# EAGLE board thick (EAGLE 9.6.2)
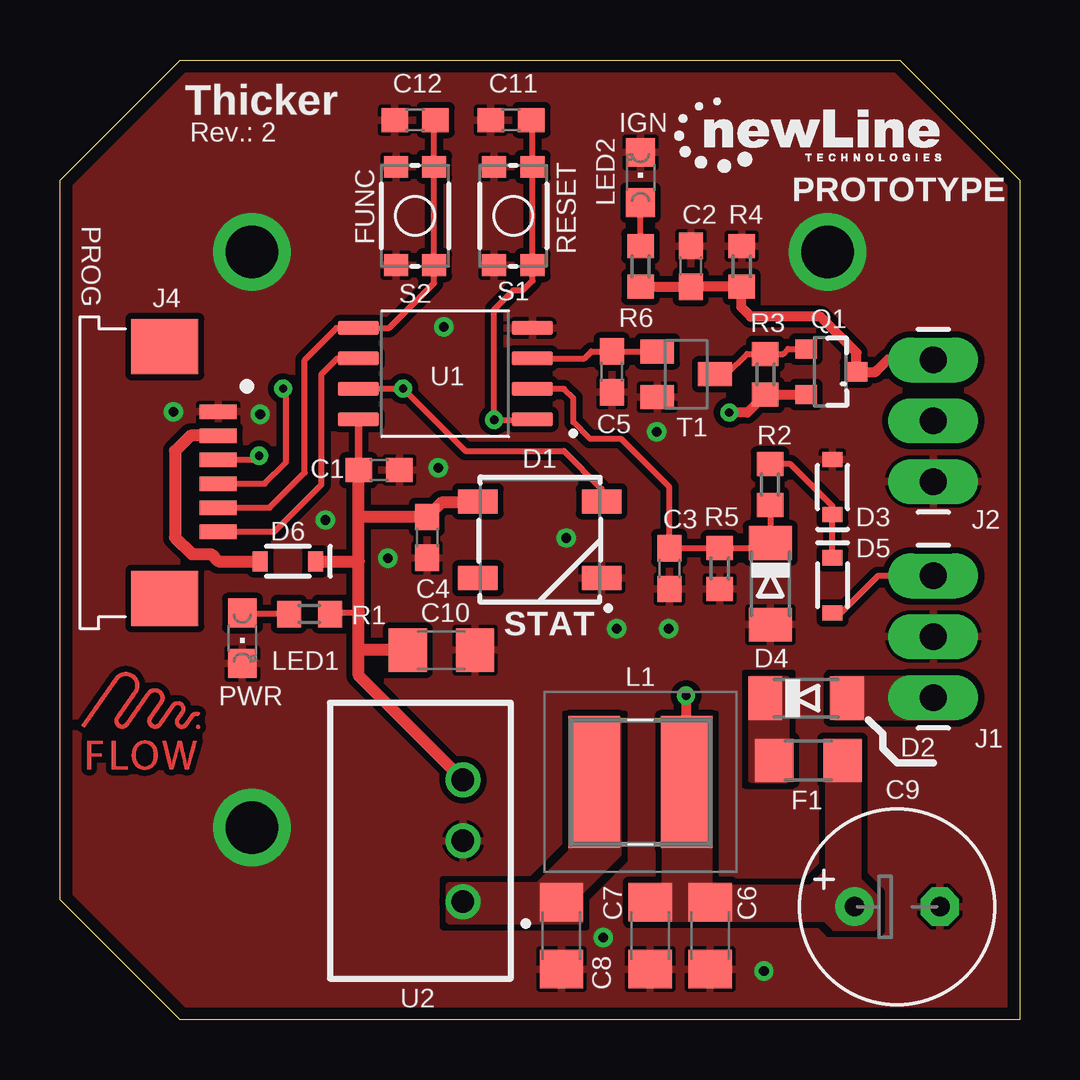
[diagram p0: board, top side]
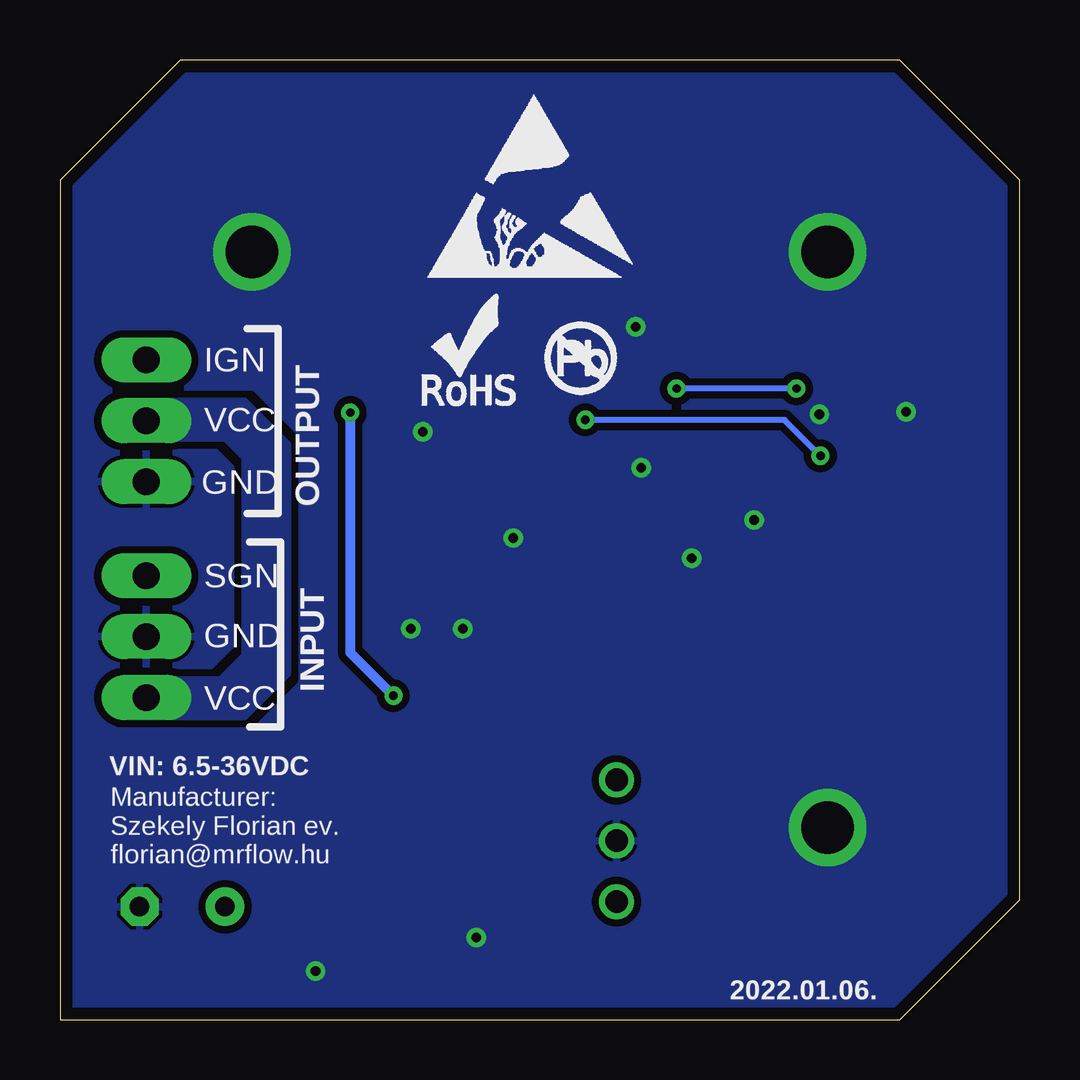
[diagram p1: board, bottom side, seen from below]

Size 40 x 40 mm. Coordinates in mm from the lower left corner, seen from the top.
Outline: 40,0 5,0 0,5 0,35 5,40 35,40 40,35 40,0
Copper layers (1*16): Top 0.035mm / dielectric 1.5mm / Bottom 0.035mm
Design rules "NYAKARUHAZ *": minimum track width 6mil, minimum drill 12mil, track to track 10mil, track to pad 10mil, pad to pad 10mil, via to via 10mil, smd to smd 6mil, copper to edge 20mil, drill to drill 8mil, minimum pad ring 10mil, minimum via ring 8mil, stop-mask expansion 4mil, vias tented up to drill 16mil, thermal gap 6mil

## Footprints (pad centres in the part's own frame; a part is rotated, then mirrored left to right if it is on the bottom)
C0603 = smd 1.1 x 1: 1 -0.85,0; 2 0.85,0
C1206 = smd 1.6 x 1.8: 1 -1.4,0; 2 1.4,0
E3,5-8 = drill 0.813 pad 1.6: + -1.778,0 | drill 0.813 pad 1.6 octagon: - 1.778,0
WS2812B = smd 1.651 x 1: 1 2.577,-1.6; 2 2.577,1.6; 3 -2.577,1.6; 4 -2.577,-1.6
MINIMELF = smd 1.4 x 1.8: A 1.7,0; C -1.7,0
SOD-323 = smd 0.63 x 0.83: A 1.15,0; C -1.15,0
R1206 = smd 1.6 x 1.803: 1 -1.422,0; 2 1.422,0
1X03_LONGPADS = drill 1.118 pad 1.88 long: 1 0,0; 2 2.54,0; 3 5.08,0
1X06-1MM = smd 0.6 x 1.55: 1 -2.54,1.27; 2 -1.54,1.27; 3 -0.54,1.27; 4 0.46,1.27; 5 1.46,1.27; 6 2.46,1.27 | smd 2.3 x 2.8: P$1 -5.25,-0.955; P$2 5.25,-0.955
TCK047 = smd 5.5 x 2.15: 1 0,1.925; 2 0,-1.925
CHIPLED_0805 = smd 1.2 x 1.2: A 0,-1.05; C 0,1.05
SOT23-3 = smd 0.8 x 0.9: 1 -0.95,-1; 2 0.95,-1; 3 0,1.1
R0603 = smd 1 x 1.1: 1 -0.85,0; 2 0.85,0
TACTILE_SWITCH_SMD_4.6X2.8MM = smd 0.9 x 1: 1 -2.05,-0.8; 2 2.05,-0.8; 3 2.05,0.8; 4 -2.05,0.8
SC59-BEC = smd 1 x 1.4: B -0.95,-1.2; C 0,1.2; E 0.95,-1.2
SOIC127P798X216-8N = smd 1.71 x 0.58: 1 -3.63,1.905; 2 -3.63,0.635; 3 -3.63,-0.635; 4 -3.63,-1.905; 5 3.63,-1.905; 6 3.63,-0.635; 7 3.63,0.635; 8 3.63,1.905
TSR-0.5-2433 = drill 0.94 pad 1.44: 1 3.21,2; 2 5.75,2; 3 8.29,2

## Placement (x,y rotation side)
C1  0.1uF  [C0603]  13.3,22.9 0 top
C2  0.1uF  [C0603]  26.3,31.4 90 top
C3  1uF  [C0603]  25.4,18.8 270 top
C4  1uF  [C0603]  15.3,20.1 270 top
C5  0.1uF  [C0603]  23,27 270 top
C6  4.7uF  [C1206]  27.1,3.5 270 top
C7  4.7uF  [C1206]  24.6,3.5 270 top
C8  4.7uF  [C1206]  20.9,3.5 270 top
C9  100uF  [E3,5-8]  34.9,4.7 0 top
C10  4.7uF  [C1206]  15.9,15.4 0 top
C11  0.1uF  [C0603]  18.8,37.5 180 top
C12  0.1uF  [C0603]  14.8,37.5 180 top
D1  WS2812B  [WS2812B]  20,20 180 top
D2  [MINIMELF]  31.1,13.4 0 top
D3  tvs  [SOD-323]  32.2,22.2 90 top
D4  5.6V  [MINIMELF]  29.61,18.16 270 top
D5  0.5A/40V/420mV  [SOD-323]  32.2,18.1 270 top
D6  0.5A/40V/420mV  [SOD-323]  9.5,19.1 180 top
F1  [R1206]  31.2,10.8 0 top
J1  [1X03_LONGPADS]  36.4,18.5 270 top
J2  [1X03_LONGPADS]  36.4,27.5 270 top
J4  F1003WR-S-06PT  [1X06-1MM]  5.32,22.8 270 top
L1  TCK-047  [TCK047]  24.2,9.9 270 top
LED1  [CHIPLED_0805]  7.6,15.9 180 top
LED2  [CHIPLED_0805]  24.2,35.1 0 top
Q1  SI2319DDS-T1-GE3  [SOT23-3]  32.1,27 270 top
R1  10K  [R0603]  10.4,16.9 180 top
R2  120K  [R0603]  29.6,22.3 270 top
R3  10K  [R0603]  29.4,26.9 270 top
R4  10K  [R0603]  28.42,31.4 270 top
R5  22K  [R0603]  27.5,18.8 90 top
R6  10K  [R0603]  24.2,31.4 90 top
S1  [TACTILE_SWITCH_SMD_4.6X2.8MM]  18.9,33.5 90 top
S2  [TACTILE_SWITCH_SMD_4.6X2.8MM]  14.8,33.5 90 top
T1  [SC59-BEC]  26.1,26.9 270 top
U1  ATTINY85-20SU  [SOIC127P798X216-8N]  16.06,26.92 180 top
U2  TSR_0.5-2450  [TSR-0.5-2433]  18.8,1.7 90 top
U$1  [ESD_LOGO]  25,30.3 0 bottom
U$2  [NO_PB_LOGO_0.120]  20.01,25.67 0 bottom
U$3  [ROHS_LOGO_0.18_IN]  25.1,25.5 0 bottom
U$5  [MRFLOW_7_5MM]  0.9,10 0 top

## Library data of the parts
C1-C12 R1-R6 = resistor
D1 = SparkFun-LED; PROD_ID: DIO-12503
D2 D4 = diode
D3 = SparkFun-DiscreteSemi; PROD_ID: DIO-10955; VALUE: 0.5A/40V/420mV
D5 D6 = SparkFun-DiscreteSemi; PROD_ID: DIO-10955
F1 LED1 LED2 = adafruit
J1 J2 = SparkFun-Connectors
J4 U$1 U$5 = FloManEagle
L1 = TCK-047; DESCRIPTION: Common Mode Choke, 0.01mH,1.44A; HEIGHT: 5mm; MANUFACTURER_NAME: Traco Power; MANUFACTURER_PART_NUMBER: TCK-047; MOUSER_PART_NUMBER: 495-TCK-047; MOUSER_PRICE-STOCK: https://www.mouser.co.uk/ProductDetail/TRACO-Power/TCK-047?qs=ckJk83FOD0WGchnAom6PdQ%3D%3D
Q1 = SparkFun-DiscreteSemi; PROD_ID: TRANS-11308
S1 S2 = SparkFun-Switches; PROD_ID: SWCH-13065
T1 = transistor
U1 = ATTINY85-20SU; AVAILABILITY: Warning; DESCRIPTION: AVR AVR® ATtiny, Functional Safety (FuSa) Microcontroller IC 8-Bit 20MHz 8KB (4K x 16) FLASH 8-SOIC; MF: Microchip Technology; MP: ATTINY85-20SU; PACKAGE: SOIC-8 Microchip; PRICE: None; PURCHASE-URL: https://pricing.snapeda.com/search/part/ATTINY85-20SU/?ref=eda
U2 = TSR_0.5-2450; DESCRIPTION: 0.5 Amp POL switching regulator, 4.75 to -32 VDC input, pos.-pos. circuit, LM78 compatible, SIP-3; HEIGHT: mm; MANUFACTURER_NAME: Traco Power; MANUFACTURER_PART_NUMBER: TSR 0.5-2450; MOUSER_PART_NUMBER: 495-TSR0.5-2450; MOUSER_PRICE-STOCK: https://www.mouser.co.uk/ProductDetail/TRACO-Power/TSR-05-2450?qs=ckJk83FOD0XpEgQBSwF%2FIw%3D%3D
U$2 U$3 = SparkFun-Aesthetics

## Nets
5V: C1.1 C4.1 C10.1 D1.1 D6.C R1.1 U1.8 U2.3
!RESET: C11.1 J4.3 S1.1 S1.2 U1.1
AIN: C3.1 D4.C R2.2 R5.2 U1.2
GND: C1.2 C2.2 C3.2 C4.2 C5.2 C6.2 C7.2 C8.2 C9.- C10.2 C11.2 C12.2 D1.3 D3.A D4.A J1.2 J2.3 J4.1 LED1.C LED2.C R4.1 R5.1 S1.3 S1.4 S2.3 S2.4 T1.E U1.4 U2.2
IGN_EN: C5.1 T1.B U1.3
IGNITION: C2.1 J2.1 Q1.3 R4.2 R6.1
MISO: J4.6 U1.6
MOSI: C12.1 J4.5 S2.1 S2.2 U1.5
N$1: Q1.1 R3.1 T1.C
N$2: C8.1 L1.2 U2.1
N$3: LED1.A R1.2
N$4: LED2.A R6.2
N$5: D6.A J4.2
N$6: D3.C D5.C R2.1
N$11: D2.C F1.1
SCK: D1.4 J4.4 U1.7
SIGNAL: D5.A J1.1
VCC: D2.A J1.3 J2.2
VDD: C6.1 C7.1 C9.+ F1.2 L1.1 Q1.2 R3.2

## Tracks (layer width: path | path; a pad name or v marks a point on that pad's centre or on a via)
5V
  Top 0.254: 12.45,17 12.4,16.95 11.3,16.95
  Top 0.305: C1.1 12.45,25 U1.8
  Top 0.508: D1.1 17.37,21.55 15.9,21.55 C4.1 12.5,20.95 12.45,21 | U2.3 12.45,14.34 12.45,15.5 | 12.45,15.5 12.45,17 12.45,19.1 | 12.45,19.1 12.45,21 | 12.45,21 C1.1 | 11.3,16.95 R1.1 | D6.C 12.45,19.1 | C10.1 12.55,15.4 12.45,15.5
!RESET  (via drill 0.35)
  Top 0.254: J4.3 8.14,23.34 v8.3,23.5 | U1.1 19.68,25 v18.1,25 18.1,29.6 18.9,30.4 19.3,30.4 19.7,30.8 S1.1 S1.2 19.7,35.7 19.7,37.45 C11.1
  Bottom 0.254: v8.3,23.5 9.8,25 v18.1,25
AIN
  Top 0.254: R2.2 D4.C 29.39,19.65 R5.2 C3.1 25.4,22.2 23.4,24.2 22.1,24.2 21.4,24.9 21.4,25.9 21.02,26.29 U1.2
GND  (via drill 0.4, 2.2)
  other vias: 8,8 32,32 29.34,2.03 22.65,3.42 21.1,20.07 4.73,25.33 23.21,16.28 13.66,19.22 15.77,23 25.37,16.3 8.34,25.23 24.87,24.5 8,32 16,28.87 11.06,20.82
  pour Top (isolate 0.254, rank 6): -2.6,41.3 42.4,41.3 42.4,-2.6 -2.6,-2.6
  pour Bottom (isolate 0.305, rank 6): -5.1,42.3 42.1,42.3 42.1,-2.8 -5.1,-2.8
IGN_EN
  Top 0.254: U1.3 21.86,27.55 22.15,27.85 C5.1 T1.B
IGNITION
  Top 0.254: 34.1,27.1 34.2,27.2
  Top 0.406: 34.1,27.1 34,27 Q1.3 33.2,27.8 31.7,29.3 28.8,29.3 28.4,29.7 28.4,30.55 | 34.2,27.2 34.52,27.52 34.54,27.5 J2.1 | R4.2 28.4,30.55 | 28.4,30.55 C2.1 R6.1
MISO
  Top 0.254: J4.6 8.94,20.34 10.9,22.3 10.9,26.9 11.55,27.55 U1.6
MOSI
  Top 0.254: J4.5 8.74,21.34 10.2,22.8 10.2,27.5 11.53,28.82 U1.5 13.72,28.82 15.6,30.7 S2.1 S2.2 15.6,37.45 C12.1
N$1
  Top 0.254: T1.C 27.8,26.9 28.65,27.75 R3.1 30.15,27.75 30.35,27.95 Q1.1
N$2
  pour Top (no thermals): 21.3,12.5 21.3,7 19.9,5.6 16.2,5.6 16.2,4.1 21.7,4.1 21.7,5.3 23.3,6.9 23.3,12.5
N$3
  Top 0.254: R1.2 7.65,16.9 LED1.A
N$4
  Top 0.254: R6.2 LED2.A
N$5
  Top 0.508: J4.2 5.44,24.34 4.8,23.7 4.8,20.1 5.5,19.4 6.3,19.4 6.6,19.1 D6.A
N$6
  Top 0.254: D5.C D3.C 32.2,21.4 30.45,23.15 R2.1
N$11
  pour Top (no thermals): 28.8,14.2 28.8,10 30.3,10 30.3,10.1 30.3,14.2
SCK  (via drill 0.35)
  Top 0.254: J4.4 8.54,22.34 9.4,23.2 9.4,26.2 v9.3,26.3 | U1.7 14.29,26.29 v14.3,26.3 16.9,23.7 21,23.7 22.58,22.12 D1.4
  Bottom 0.254: v9.3,26.3 v14.3,26.3
SIGNAL
  Top 0.254: J1.1 34.1,18.5 32.55,16.95 D5.A
VCC
  pour Top (no thermals): 37.3,14.2 32.3,14.2 32.2,14.1 32.2,12.7 32.3,12.6 37.3,12.6
  pour Bottom (no thermals): 37.3,14.2 33.3,14.2 32.3,15.2 32.3,23.4 33.1,24.2 37.3,24.2 37.3,25.8 32.3,25.8 30.5,24 30.5,14.4 32.3,12.6 37.3,12.6
VDD  (via drill 0.35)
  Top 0.406: v27.9,25.3 28.65,25.3 R3.2 Q1.2 | v26.1,13.5 26.1,9.93 L1.1
  Bottom 0.406: v27.9,25.3 27.9,15.3 v26.1,13.5
  pour Top (no thermals): 32,11.5 32,6.2 31.3,5.5 23.9,5.5 23.9,4.2 32.2,4.2 33.3,5.3 33.3,11.5
  pour Top (no thermals): 27.1,4.5 27.1,12.5 25.2,12.5 25.2,4.5
  pour Top (no thermals): 33.9,3.8 32.3,3.8 31.9,4.2 31.9,5.1 32.7,5.9 33.2,5.9 34,5.1 34,3.9

## Text on the board
tPlace: Thicker | Rev.: 2 | IGN | PROTOTYPE | PROG | FUNC | RESET | STAT | PWR | /Users/szekelyflorian/Downloads/logo.bmp
bPlace: OUTPUT | IGN | VCC | GND | INPUT | SGN | GND | VCC | VIN: 6.5-36VDC | Manufacturer: / Szekely Florian ev. / florian@mrflow.hu | 2022.01.06.